# Altium PCB PCB3.PcbDoc
Units mil, origin at the board's own origin, x right, y up, seen from the top; angles counter-clockwise.
Board outline 6000 x 4000 mil, 2 copper layers (Top Layer, Bottom Layer); 34 components, 83 nets, 224 pads, 0 vias.
Unrouted connection lines stored in the file: 1.
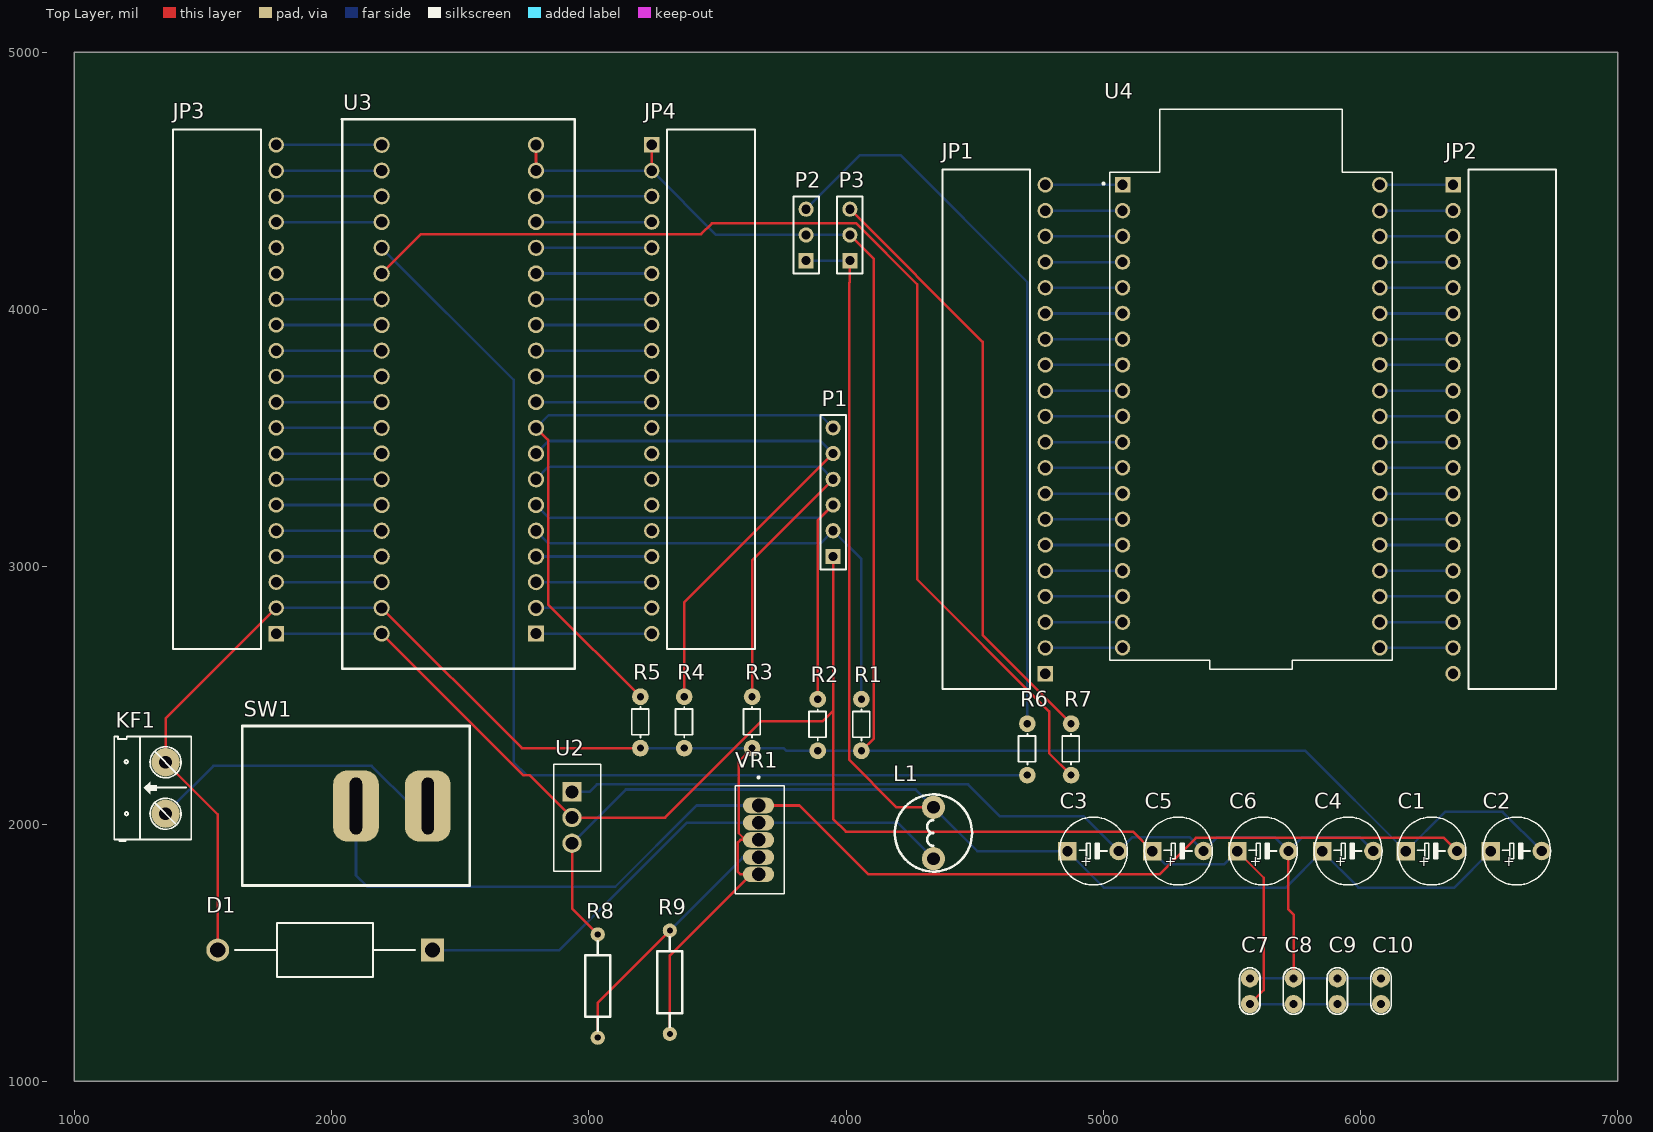
[diagram p0: Top Layer view]
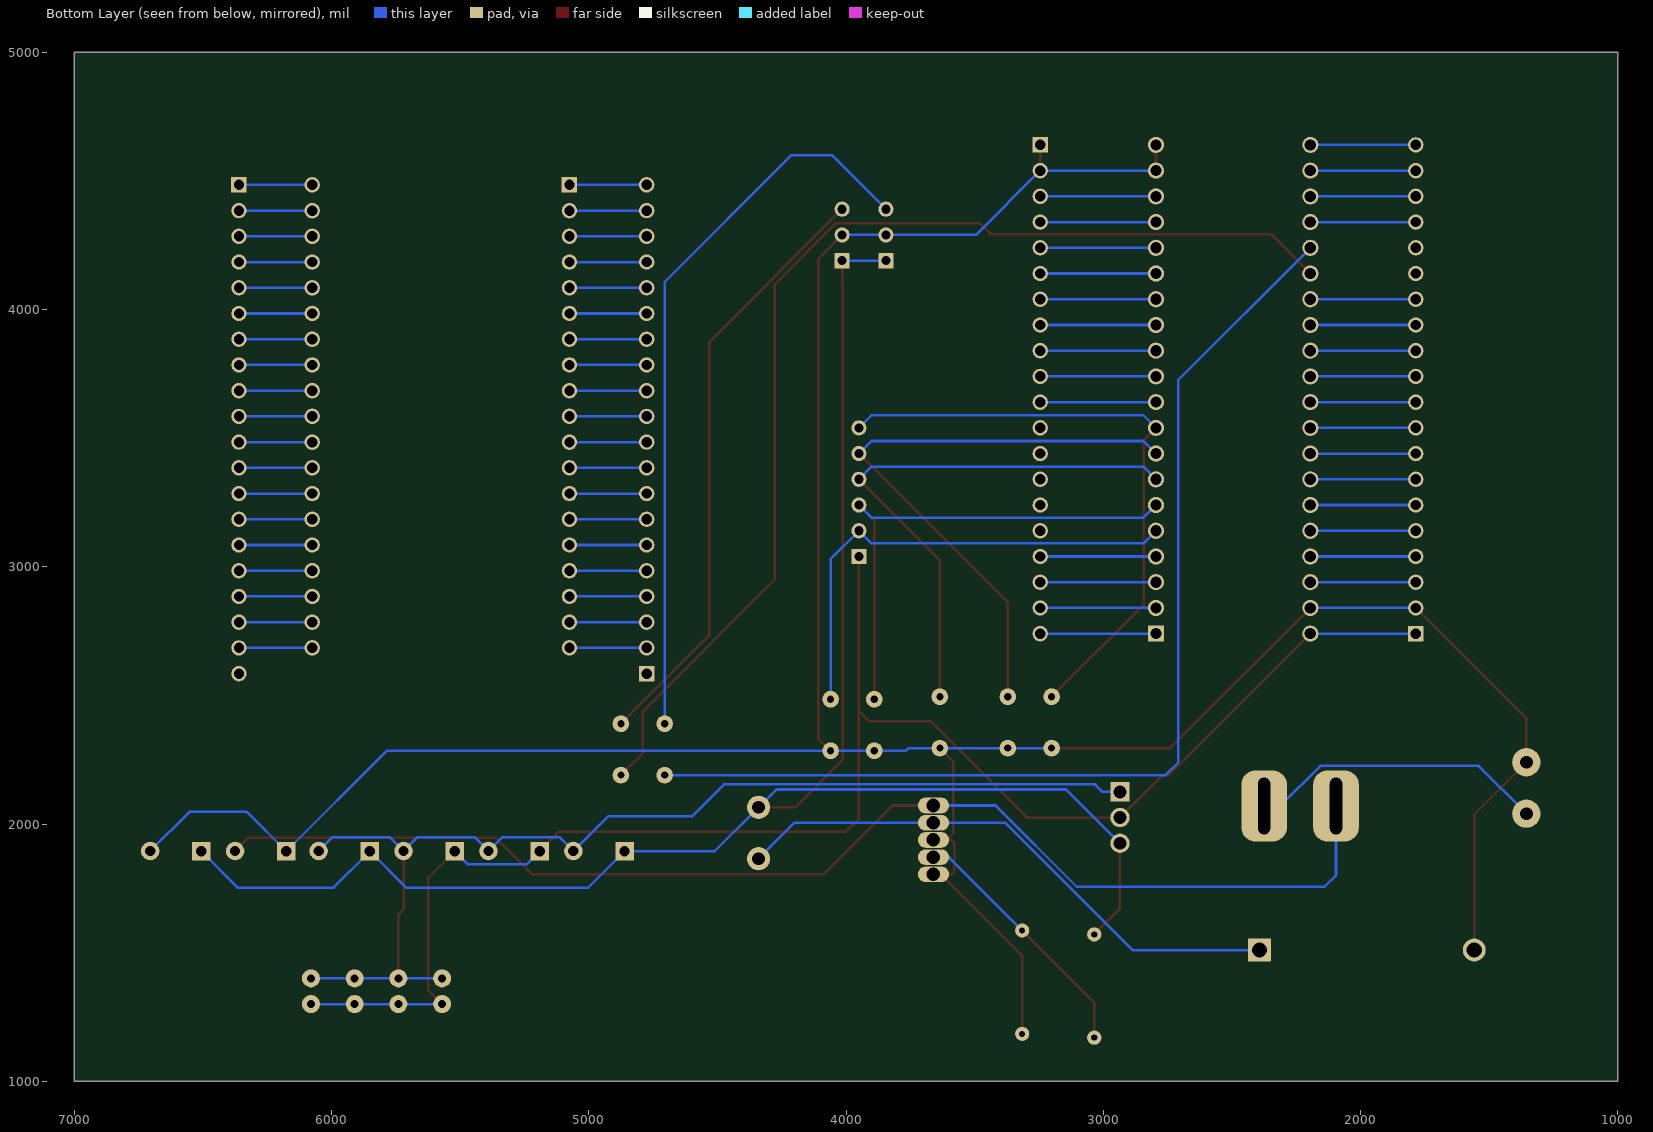
[diagram p1: Bottom Layer view, seen from below]
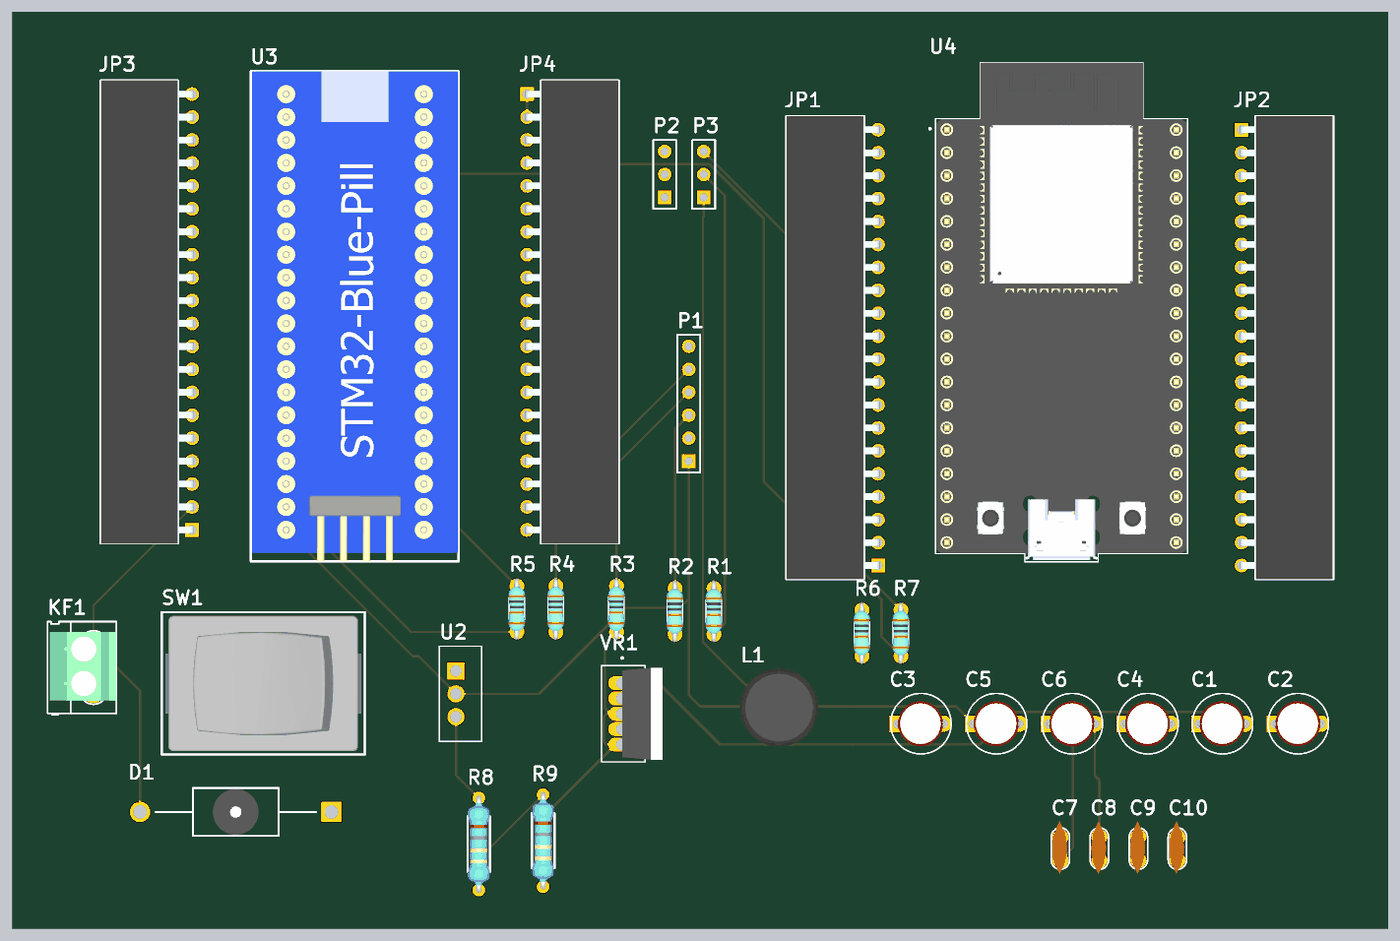
[diagram p2: 3D render of the assembled board from above, using the file's embedded part models]

## Layer stack, top to bottom
Top Solder: solder mask 0.4, Solder Resist, Dk 3.5
Top Layer: signal copper 1.4
Dielectric 1: dielectric 12.6, FR-4, Dk 4.8
Bottom Layer: signal copper 1.4
Bottom Solder: solder mask 0.4, Solder Resist, Dk 3.5

## Board outline
1000,1000 7000,1000 7000,5000 1000,5000

## Design rules (kind name [scope] priority, off if disabled: settings)
Clearance [All] p1: gap=10 ignorepadtopadclearanceinfootprint=FALSE except(0: Arc-Hole Track-Hole SMDPad-Hole THPad-Hole Via-Hole Fill-Hole Poly-Hole Region-Hole Text-Hole)
MinimumSolderMaskSliver [All] p1: minsoldermaskwidth=1
PolygonConnect [All] p1: connectstyle=Relief reliefconductorwidth=10 reliefentries=4 polygonreliefangle="90 Angle" airgapwidth=10
RoutingVias [All] p1: holewidth=28 width=50 viastyle="Through Hole" minholewidth=50 minwidth=50 maxholewidth=28 maxwidth=50
SolderMaskExpansion [All] p1: expansion=4 istentingtop=FALSE
Width [All] p1: maxlimit=10 minlimit=10 preferedwidth=10
29 further rules are at their usual default settings.

## Components (designator, comment, footprint, x,y, rotation, side; value= is the part's Value field where it differs from the comment)
C1 "100uF" CA-ALU-5R 6275,1895 r0 top
C2 "300uF" CA-ALU-5R 6605,1895 r0 top
C3 "22uF" CA-ALU-5R 4960,1895 r0 top
C4 "100uF" CA-ALU-5R 5950,1895 r0 top
C5 "100uF" CA-ALU-5R 5290,1895 r0 top
C6 "22uF" CA-ALU-5R 5620,1895 r0 top
C7 "104" CN1 5570,1300 r90 top
C8 "104" CN1 5740,1300 r90 top
C9 "104" CN1 5910,1300 r90 top
C10 "104" CN1 6080,1300 r90 top
D1 "1N5822" DIOAD2120W130L950D530P 1975,1510 r180 top
JP1 "JP 1x20 2.54" "JP 1x20 CC" 4775,3534.61 r90 top
JP2 "JP 1x20 2.54" "JP 1x20 CC" 6360,3534.61 r270 top
JP3 "JP 1x20 2.54" "JP 1x20 CC" 1784.93,3690 r90 top
JP4 "JP 1x20 2.54" "JP 1x20 CC" 3245,3690 r270 top
KF1 "CON 2 KF301" "Con 2 KF301 5.08" 1355,2040 r90 top
L1 "68uH 3A" "CUON CAM 100uH3A" 4340,1965 r90 top
P1 "Quang_tro" HDR1X6 3950,3040 r90 top
P2 "Servo_H" HDR1X3 3845,4190 r90 top
P3 "Servo_V" HDR1X3 4015,4190 r90 top
R1 "10k" R1/8W 4060,2385 r90 top value="R1/4W - 1K"
R2 "10k" R1/8W 3890,2385 r90 top value="R1/4W - 1K"
R3 "10k" R1/8W 3635,2395 r90 top value="R1/4W - 1K"
R4 "10k" R1/8W 3370.86,2395 r90 top value="R1/4W - 1K"
R5 "10k" R1/8W 3200.86,2395 r90 top value="R1/4W - 1K"
R6 "10k" R1/8W 4705,2290 r90 top value="R1/4W - 1K"
R7 "10k" R1/8W 4875,2290 r90 top value="R1/4W - 1K"
R8 "12k" "tro vach 1/4w" 3035,1370 r90 top
R9 "2.2k" "tro vach 1/4w" 3315,1385 r90 top
SW1 "SWITCH 10A-2PIN" SW_2ARS_TH 2372.53,2071 r270 top
U2 "LM1117T-ADJ" TO254P470X1016X2222-3P 2975,1925 r270 top
U3 "Bluepill" "Blue Pill" 2195,2740 r0 top
U4 "ESP32-DEVKITC" MODULE_ESP32-DEVKITC 5575,3585 r0 top
VR1 "LM2576T-ADJ" TO170P1067X483X1651-5 3660,1938.07 r270 top

## Footprints (in the part's own frame and the unit in brackets; to place one, negate y for a bottom-side part, rotate by r counter-clockwise, add the part's x,y. Pads: shape width x height; smd on the part's side, far side on the other; paste and mask are expansions set on the pad)
"Blue Pill" [mm]
  round 1.6 hole 1.1: 1(0,48.26) 2(0,45.72) 3(0,43.18) 4(0,40.64) 5(0,38.1) 6(0,35.56) 7(0,33.02) 8(0,30.48) 9(0,27.94) 10(0,25.4) 11(0,22.86) 12(0,20.32) 13(0,17.78) 14(0,15.24) 15(0,12.7) 16(0,10.16) 17(0,7.62) 18(0,5.08) 19(0,2.54) 20(0,0) 22(15.24,2.54) 23(15.24,5.08) 24(15.24,7.62) 25(15.24,10.16) 26(15.24,12.7) 27(15.24,15.24) 28(15.24,17.78) 29(15.24,20.32) 30(15.24,22.86) 31(15.24,25.4) 32(15.24,27.94) 33(15.24,30.48) 34(15.24,33.02) 35(15.24,35.56) 36(15.24,38.1) 37(15.24,40.64) 38(15.24,43.18) 39(15.24,45.72) 40(15.24,48.26)
  rect 1.6x1.6 hole 1.1: 21(15.24,0)
  silkscreen extent -3.94,-3.48 19.08,50.8, body extent -3.81,-3.48 19.05,50.8, height 3.56
CA-ALU-5R [mil]
  rect 72x72 hole 40: 1(-99,-1)
  round 72 hole 40: 2(100,0)
  silkscreen extent -130,-132 134,132, body extent -108,-98 108,98, height 551
CN1 [mil]
  round 70 hole 31: 1(0,0) 2(100,0)
  silkscreen extent -40,-40 141,40, body extent -60,-30 170,37, height 265
"Con 2 KF301 5.08" [mil]
  round 110 hole 50: 1(0,0) 2(200,0)
  silkscreen extent -106,-100 300,200, body extent -45,-97 255,190, height 335
"CUON CAM 100uH3A" [mil] "100uH3A"
  round 90 hole 50: 1(-100,0) 2(100,0)
  silkscreen extent -150,-150 150,150, body extent -171,-175 171,167, height 394
DIOAD2120W130L950D530P [mm]
  round 2.25 hole 1.5: A(10.6,0)
  rect 2.25x2.25 / inner round 2.25 / far side rect 2.25x2.25 hole 1.5: C(-10.6,0)
  silkscreen extent -8.89,-2.65 8.89,2.65, body extent -2.54,-2.54 2.54,2.54, height 30.16
HDR1X3 [mm] "Connector; Header; 3 Position"
  rect 1.5x1.5 hole 0.9: 1(0,0)
  round 1.5 hole 0.9: 2(2.54,0) 3(5.08,0)
  silkscreen extent -1.27,-1.27 6.35,1.27, body extent -1.27,-1.27 6.35,1.27, height 7
HDR1X6 [mm] "Connector; Header; 6 Position"
  rect 1.5x1.5 hole 0.9: 1(0,0)
  round 1.5 hole 0.9: 2(2.54,0) 3(5.08,0) 4(7.62,0) 5(10.16,0) 6(12.7,0)
  silkscreen extent -1.27,-1.27 13.97,1.27, body extent -1.27,-1.27 13.97,1.27, height 7
"JP 1x20 CC" [mm] "20p 1 row Right angle"
  rect 1.52x1.52 hole 1.02: 1(-24.13,0)
  round 1.52 hole 1.02: 2(-21.59,0) 3(-19.05,0) 4(-16.51,0) 5(-13.97,0) 6(-11.43,0) 7(-8.89,0) 8(-6.35,0) 9(-3.81,0) 10(-1.27,0) 11(1.27,0) 12(3.81,0) 13(6.35,0) 14(8.89,0) 15(11.43,0) 16(13.97,0) 17(16.51,0) 18(19.05,0) 19(21.59,0) 20(24.13,0)
  silkscreen extent -25.65,1.52 25.65,10.17, body extent -25.65,-0.21 25.65,10.09, height 2.51
MODULE_ESP32-DEVKITC [mm]
  rect 1.53x1.53 / inner round 1.53 / far side rect 1.53x1.53 hole 1.02: 1(-12.7,22.85)
  round 1.53 hole 1.02: 2(-12.7,20.31) 3(-12.7,17.77) 4(-12.7,15.23) 5(-12.7,12.69) 6(-12.7,10.15) 7(-12.7,7.61) 8(-12.7,5.07) 9(-12.7,2.53) 10(-12.7,-0.01) 11(-12.7,-2.55) 12(-12.7,-5.09) 13(-12.7,-7.63) 14(-12.7,-10.17) 15(-12.7,-12.71) 16(-12.7,-15.25) 17(-12.7,-17.79) 18(-12.7,-20.33) 19(-12.7,-22.87) 20(12.7,-22.87) 21(12.7,-20.33) 22(12.7,-17.79) 23(12.7,-15.25) 24(12.7,-12.71) 25(12.7,-10.17) 26(12.7,-7.63) 27(12.7,-5.09) 28(12.7,-2.55) 29(12.7,-0.01) 30(12.7,2.53) 31(12.7,5.07) 32(12.7,7.61) 33(12.7,10.15) 34(12.7,12.69) 35(12.7,15.23) 36(12.7,17.77) 37(12.7,20.31) 38(12.7,22.85)
  silkscreen extent -14.67,-25 13.95,30.3, body extent -13.97,-24.8 13.97,30.3, height 3.25
R1/8W [mil] "R 1/8W, 2 pin, 300mil"
  round 65 hole 28: 1(-100,0) 2(100,0)
  silkscreen extent -60,-32 61,34, body extent -135,-35 135,37, height 86
SW_2ARS_TH [mm] "CASE: TH"
  rrect60% 7x4.5 hole 1.2 slot 5.6 at 0 deg mask+0.076: 1(0.025,0.051) 2(0.025,-7.049)
  silkscreen extent -7.87,-18.29 7.87,4.19, body extent -7.47,-17.9 7.53,3.8, height 17.81
TO170P1067X483X1651-5 [mm]
  oval 1.55x3.1 hole 1.34: 1(-3.4,0) 2(-1.7,0) 3(0,0) 4(1.7,0) 5(3.4,0)
  silkscreen extent -6.27,-2.29 5.33,2.54, body extent -5.08,0 5.08,4.45, height 16.84
TO254P470X1016X2222-3P [mil]
  rect 75x75 hole 50: 1(-200,-40)
  round 75 hole 50: 2(-100,-40) 3(0,-40)
  silkscreen extent -308,-112 108,72
"tro vach 1/4w" [mm]
  round 1.4 hole 0.6: 1(-5.1,0) 2(5.1,0)
  silkscreen extent -4.39,-1.25 4.42,1.25, body extent -5.38,-1.2 5.38,1.2, height 2.41

## Part data
C1 C2: library part "Tu Nhom 100uF 16V", "Dán", Chung_Loai=Dán, Don_Vi=Con, Ma_Hang=MH002219, So_Chan=2, Ten_Linh_Kien="Tụ Nhôm 100uF 16V 6.3x5.4MM"
C3 C6: library part "Tu tantalum 22uF 25V SMD6032", "Dán", Chung_Loai=Dán, Don_Vi=Con, Ma_Hang=MH002651, So_Chan=2, Ten_Linh_Kien="Tụ tantalum 226E-22uF 25V SMD6032"
C4 C5: library part "Tu tantalum 100uF 10V SMD6032", "Dán", Chung_Loai=Dán, Don_Vi=Con, Ma_Hang=MH007594, So_Chan=2, Ten_Linh_Kien="Tụ tantalum 107A-100uF 10V SMD6032"
C7 C8 C9 C10: library part "Tu 0603 104 50V 10%", "Dán", Chung_Loai=Dán, Don_Vi=Con, Ma_Hang=MH004568, So_Chan=2, Ten_Linh_Kien="Tụ 0603 104-100nF 10% 50V"
D1: "Diode Schottky 40 V 3A Through Hole DO-201AD", Package="DO-201 STMicroelectronics", Availability="In Stock", Check_prices=https://www.snapeda.com/parts/1N5822/STMicroelectronics/view-part/?ref=eda, MF=STMicroelectronics, MP=1N5822, Price=None, Purchase-URL=https://pricing.snapeda.com/search/part/1N5822/?ref=eda, SnapEDA_Link=https://www.snapeda.com/parts/1N5822/STMicroelectronics/view-part/?ref=snap
JP1 JP2 JP3 JP4: library part "JP 1x20 2.54 Cai Cong", "Cắm", Chung_Loai=Cắm, Don_Vi=Con, Ma_Hang=MH001265, Ten_Linh_Kien="Jump Đơn Cái 2.54MM 1x40P Cong"
KF1: "Cắm", Chung_Loai=Cắm, Don_Vi=Con, Ma_Hang=MH000987, Ten_Linh_Kien="CON 2 KF301-2P 5.08MM Xanh Dương"
L1: library part "CUON CAM 100uH DIP", "Dán", Chung_Loai=Dán, Don_Vi=Con, Ma_Hang=MH002209, Ten_Linh_Kien="Cuộn Cảm 100uH 3A 8x10MM"
P1: library part "Header 6", "Header, 6-Pin", LatestRevisionDate=17-Jul-2002, LatestRevisionNote="Re-released for DXP Platform.", Publisher="Altium Limited"
P2 P3: library part "Header 3", "Header, 3-Pin", LatestRevisionDate=17-Jul-2002, LatestRevisionNote="Re-released for DXP Platform.", Publisher="Altium Limited"
R1 R2 R3 R4 R5 R6 R7: library part R, "Resistor 1/4W"
R8: library part "Tro Vach 1/4W 5% 12k", "Cắm", Chung_Loai=Cắm, Don_Vi=Con, Ma_Hang=MH007389, So_Chan=2, Ten_Linh_Kien="Trở Vạch 1/4w 5% 12k"
R9: library part "Tro Vach 1/4W 5% 2.2k", "Cắm", Chung_Loai=Cắm, Don_Vi=Con, Ma_Hang=MH007293, So_Chan=2, Ten_Linh_Kien="Trở Vạch 1/4w 5% 2.2k"
SW1: library part SW1_RS-471005264153-TH, "Rocker Switch SPST 16A (AC), 10A (DC) 250V Panel Mount, Snap-In", Alternate Part Number-1=NA, Case/Package=TH, Manufacturer="Würth Elektronik", Manufacturer Part Number=471005264153, Supplier Part Number-1=471005264153, Supplier-1="Würth Elektronik"
U2: "Linear Voltage Regulator IC 1 Output 800mA TO-220-3", Package="TO-220 National Semiconductor", Availability=Unavailable, MF="Texas Instruments", MP=LM1117TADJ, Price=None, SnapEDA_Link=https://www.snapeda.com/parts/LM1117TADJ/Texas%20Instruments/view-part/20524/?ref=snap
U3: library part STM32F103C8T6, "STM32F103C8T6"
U4: "ESP32-WROOM-32UE series Transceiver; 802.11 b/g/n (Wi-Fi, WiFi, WLAN), Bluetooth Â® Smart Ready 4.x Dual Mode Evaluation Board", Package=None, Availability="In Stock", Check_prices=https://www.snapeda.com/parts/ESP32-DEVKITC/Espressif+Systems/view-part/?ref=eda, MF="Espressif Systems", MP=ESP32-DEVKITC, Price=None, Purchase-URL=https://pricing.snapeda.com/search/part/ESP32-DEVKITC/?ref=eda, SnapEDA_Link=https://www.snapeda.com/parts/ESP32-DEVKITC/Espressif+Systems/view-part/?ref=snap
VR1: "SIMPLE SWITCHER&reg; 40V, 3A Low Component Count Step-Down Regulator 5-TO-220 -40 to 125", Package="TO-220-5 Texas Instruments", Availability="In Stock", Check_prices=https://www.snapeda.com/parts/LM2576T-ADJ/Texas+Instruments/view-part/?ref=eda, MF="Texas Instruments", MP=LM2576T-ADJ, Price=None, Purchase-URL=https://pricing.snapeda.com/search/part/LM2576T-ADJ/?ref=eda, SnapEDA_Link=https://www.snapeda.com/parts/LM2576T-ADJ/Texas+Instruments/view-part/?ref=snap

## Nets (pads, with @x,y where several pads share a name; then routed paths per layer and width w, separated by ;. In a path a pad name is that pad's centre, name@x,y a point inside that pad or via, vN(x,y) a via of type N, cw(c..) or ccw(c..) an arc to the next point about the centre after c; other vN are vias at no path point)
GND: C1.1 C2.2 C3.2 C4.2 C5.2 C6.2 C7.2 C8.2 C9.2 C10.2 D1.A JP3.2 JP4.1 JP4.2 KF1.2 P2.2 P3.2 R1.1 R2.1 R3.1 R4.1 R5.1 R9.1 U2.1 U3.19 U3.39 U3.40 VR1.3 VR1.5 | length 16420.9
  Top Layer w10: D1.A 1557.68,2037.32 KF1.2 1355,2410.07 JP3.2 ; U3.19 2740,2295 R5.1 ; U3.39 U3.40 ; JP4.2 JP4.1 ; R9.1 3315,1489.21 VR1.5@3630,1804.21 ; R3.1 3583,2243 3583,1964 VR1.3@3608.93,1938.07 ; VR1.5 VR1.5@3630,1804.21 ; VR1.3 VR1.3@3608.93,1938.07 ; P3.2 4108,4197 4108,2333 R1.1 ; C6.2 5720,1668 5740,1648 C8.2 ; VR1.3@3608.93,1938.07 3590,1938.07 3580,1928.07 3580,1814.21 3590,1804.21 VR1.5@3630,1804.21
  Bottom Layer w10: JP3.2 U3.19 ; U3.39 JP4.2 3495,4290 P2.2 P3.2 ; U2.1 3003,2125 3032,2154 4475,2154 4599,2030 4925,2030 C3.2 5114,1949 5336,1949 C5.2 5444,1949 5666,1949 C6.2 5774,1949 5996,1949 C4.2 ; R5.1 R4.1 R3.1 3757,2295 3767,2285 R2.1 R1.1 5785,2285 C1.1 6329,2047 6553,2047 C2.2 ; C7.2 C8.2 C9.2 C10.2
IN0: P1.2 R1.2 U3.25 | length 1896.2
  Bottom Layer w10: U3.25 2844,3091 3901,3091 P1.2 4060,3030 R1.2
IN1: P1.3 R2.2 U3.26 | length 1975.4
  Top Layer w10: R2.2 3890,3180 P1.3
  Bottom Layer w10: U3.26 2844,3191 3901,3191 P1.3
IN2: P1.4 R3.2 U3.27 | length 2171.1
  Top Layer w10: R3.2 3635,3025 P1.4
  Bottom Layer w10: U3.27 2844,3389 3901,3389 P1.4
IN3: P1.5 R4.2 U3.28 | length 2380.5
  Top Layer w10: R4.2 3370.86,2860.86 P1.5
  Bottom Layer w10: U3.28 2844,3489 3901,3489 P1.5
IN4: P1.6 R5.2 U3.29 | length 2408.7
  Top Layer w10: U3.29 2842,3493 2842,2853.86 R5.2
  Bottom Layer w10: U3.29 2844,3589 3901,3589 P1.6
NetC1_2: C1.2 SW1.2 VR1.1 | length 4890
  Top Layer w10: VR1.1 3819,2071.93 4086.93,1804 5218,1804 5360,1946 6324,1946 C1.2
  Bottom Layer w10: SW1.2 2095,1800 2139,1756 3103,1756 3418.93,2071.93 VR1.1
NetD1_C: D1.C L1.1 VR1.2 | length 2210.7
  Bottom Layer w10: D1.C 2886,1510 3381,2005 VR1.2 4200,2005 L1.1
NetJP1_2: JP1.2 U4.19 | length 300
  Bottom Layer w10: JP1.2 U4.19
NetJP1_3: JP1.3 U4.18 | length 300
  Bottom Layer w10: JP1.3 U4.18
NetJP1_4: JP1.4 U4.17 | length 300
  Bottom Layer w10: JP1.4 U4.17
NetJP1_5: JP1.5 U4.16 | length 300
  Bottom Layer w10: JP1.5 U4.16
NetJP1_6: JP1.6 U4.15 | length 300
  Bottom Layer w10: JP1.6 U4.15
NetJP1_7: JP1.7 U4.14 | length 300
  Bottom Layer w10: JP1.7 U4.14
NetJP1_8: JP1.8 U4.13 | length 300
  Bottom Layer w10: JP1.8 U4.13
NetJP1_9: JP1.9 U4.12 | length 300
  Bottom Layer w10: JP1.9 U4.12
NetJP1_10: JP1.10 U4.11 | length 300
  Bottom Layer w10: JP1.10 U4.11
NetJP1_11: JP1.11 U4.10 | length 300
  Bottom Layer w10: JP1.11 U4.10
NetJP1_12: JP1.12 U4.9 | length 300
  Bottom Layer w10: JP1.12 U4.9
NetJP1_13: JP1.13 U4.8 | length 300
  Bottom Layer w10: JP1.13 U4.8
NetJP1_14: JP1.14 U4.7 | length 300
  Bottom Layer w10: JP1.14 U4.7
NetJP1_15: JP1.15 U4.6 | length 300
  Bottom Layer w10: JP1.15 U4.6
NetJP1_16: JP1.16 U4.5 | length 300
  Bottom Layer w10: JP1.16 U4.5
NetJP1_17: JP1.17 U4.4 | length 300
  Bottom Layer w10: JP1.17 U4.4
NetJP1_18: JP1.18 U4.3 | length 300
  Bottom Layer w10: JP1.18 U4.3
NetJP1_19: JP1.19 U4.2 | length 300
  Bottom Layer w10: JP1.19 U4.2
NetJP1_20: JP1.20 U4.1 | length 300
  Bottom Layer w10: JP1.20 U4.1
NetJP2_1: JP2.1 U4.38 | length 285
  Bottom Layer w10: U4.38 JP2.1
NetJP2_2: JP2.2 U4.37 | length 285
  Bottom Layer w10: U4.37 JP2.2
NetJP2_3: JP2.3 U4.36 | length 285
  Bottom Layer w10: U4.36 JP2.3
NetJP2_4: JP2.4 U4.35 | length 285
  Bottom Layer w10: U4.35 JP2.4
NetJP2_5: JP2.5 U4.34 | length 285
  Bottom Layer w10: U4.34 JP2.5
NetJP2_6: JP2.6 U4.33 | length 285
  Bottom Layer w10: U4.33 JP2.6
NetJP2_7: JP2.7 U4.32 | length 285
  Bottom Layer w10: U4.32 JP2.7
NetJP2_8: JP2.8 U4.31 | length 285
  Bottom Layer w10: U4.31 JP2.8
NetJP2_9: JP2.9 U4.30 | length 285
  Bottom Layer w10: U4.30 JP2.9
NetJP2_10: JP2.10 U4.29 | length 285
  Bottom Layer w10: U4.29 JP2.10
NetJP2_11: JP2.11 U4.28 | length 285
  Bottom Layer w10: U4.28 JP2.11
NetJP2_12: JP2.12 U4.27 | length 285
  Bottom Layer w10: U4.27 JP2.12
NetJP2_13: JP2.13 U4.26 | length 285
  Bottom Layer w10: U4.26 JP2.13
NetJP2_14: JP2.14 U4.25 | length 285
  Bottom Layer w10: U4.25 JP2.14
NetJP2_15: JP2.15 U4.24 | length 285
  Bottom Layer w10: U4.24 JP2.15
NetJP2_16: JP2.16 U4.23 | length 285
  Bottom Layer w10: U4.23 JP2.16
NetJP2_17: JP2.17 U4.22 | length 285
  Bottom Layer w10: U4.22 JP2.17
NetJP2_18: JP2.18 U4.21 | length 285
  Bottom Layer w10: U4.21 JP2.18
NetJP2_19: JP2.19 U4.20 | length 285
  Bottom Layer w10: U4.20 JP2.19
NetJP3_3: JP3.3 U3.18 | length 410.1
  Bottom Layer w10: JP3.3 U3.18
NetJP3_4: JP3.4 U3.17 | length 410.1
  Bottom Layer w10: JP3.4 U3.17
NetJP3_5: JP3.5 U3.16 | length 410.1
  Bottom Layer w10: JP3.5 U3.16
NetJP3_6: JP3.6 U3.15 | length 410.1
  Bottom Layer w10: JP3.6 U3.15
NetJP3_7: JP3.7 U3.14 | length 410.1
  Bottom Layer w10: JP3.7 U3.14
NetJP3_8: JP3.8 U3.13 | length 410.1
  Bottom Layer w10: JP3.8 U3.13
NetJP3_9: JP3.9 U3.12 | length 410.1
  Bottom Layer w10: JP3.9 U3.12
NetJP3_10: JP3.10 U3.11 | length 410.1
  Bottom Layer w10: JP3.10 U3.11
NetJP3_11: JP3.11 U3.10 | length 410.1
  Bottom Layer w10: JP3.11 U3.10
NetJP3_12: JP3.12 U3.9 | length 410.1
  Bottom Layer w10: JP3.12 U3.9
NetJP3_13: JP3.13 U3.8 | length 410.1
  Bottom Layer w10: JP3.13 U3.8
NetJP3_14: JP3.14 U3.7 | length 410.1
  Bottom Layer w10: JP3.14 U3.7
NetJP3_17: JP3.17 U3.4 | length 410.1
  Bottom Layer w10: JP3.17 U3.4
NetJP3_18: JP3.18 U3.3 | length 410.1
  Bottom Layer w10: JP3.18 U3.3
NetJP3_19: JP3.19 U3.2 | length 410.1
  Bottom Layer w10: JP3.19 U3.2
NetJP3_20: JP3.20 U3.1 | length 410.1
  Bottom Layer w10: JP3.20 U3.1
NetJP4_3: JP4.3 U3.38 | length 450
  Bottom Layer w10: U3.38 JP4.3
NetJP4_4: JP4.4 U3.37 | length 450
  Bottom Layer w10: U3.37 JP4.4
NetJP4_5: JP4.5 U3.36 | length 450
  Bottom Layer w10: U3.36 JP4.5
NetJP4_6: JP4.6 U3.35 | length 450
  Bottom Layer w10: U3.35 JP4.6
NetJP4_7: JP4.7 U3.34 | length 450
  Bottom Layer w10: U3.34 JP4.7
NetJP4_8: JP4.8 U3.33 | length 450
  Bottom Layer w10: U3.33 JP4.8
NetJP4_9: JP4.9 U3.32 | length 450
  Bottom Layer w10: U3.32 JP4.9
NetJP4_10: JP4.10 U3.31 | length 450
  Bottom Layer w10: U3.31 JP4.10
NetJP4_11: JP4.11 U3.30 | length 450
  Bottom Layer w10: U3.30 JP4.11
NetJP4_17: JP4.17 U3.24 | length 450
  Bottom Layer w10: U3.24 JP4.17
NetJP4_18: JP4.18 U3.23 | length 450
  Bottom Layer w10: U3.23 JP4.18
NetJP4_19: JP4.19 U3.22 | length 450
  Bottom Layer w10: U3.22 JP4.19
NetJP4_20: JP4.20 U3.21 | length 450
  Bottom Layer w10: U3.21 JP4.20
NetKF1_1: KF1.1 SW1.1 | length 1161.2
  Bottom Layer w10: KF1.1 1541,2226 2156,2226 2312,2070 SW1.1
NetP2_3: P2.3 R6.2 | length 2867.6
  Bottom Layer w10: P2.3 4055,4600 4211,4600 4705,4106 R6.2
NetP3_3: P3.3 R7.2 | length 2356.2
  Top Layer w10: P3.3 4531,3874 4531,2734 R7.2
NetR8_1: R8.1 R9.2 VR1.4 | length 997.6
  Top Layer w10: R8.1 3035,1305.79 R9.2
  Bottom Layer w10: R9.2 3597.21,1868 3597.21,1871.14 VR1.4
TIM_CH1: R6.1 U3.5 | length 4230.2
  Bottom Layer w10: U3.5 2708,3727 2708,2240 2758,2190 R6.1
TIM_CH2: R7.1 U3.6 | length 4416.6
  Top Layer w10: U3.6 2348,4293 3437,4293 3479,4335 4040,4335 4277,4098 4277,2951 4790,2438 4790,2275 R7.1
VCC3V3: C5.1 C6.1 C7.1 C8.1 C9.1 C10.1 JP3.1 P1.1 U2.2 U3.20 | length 6486.8
  Top Layer w10: U3.20 2746,2189 2771,2189 U2.2 3297,2025 3672,2400 3910,2400 3950,2440 ; P1.1 3950,2440 ; C5.1 5115,1970 4000,1970 3950,2020 3950,2440 ; C6.1 5624,1791 5624,1354 C7.1
  Bottom Layer w10: JP3.1 U3.20 ; C5.1 5241,1844 5471,1844 C6.1 ; C7.1 C8.1 C9.1 C10.1
VCC7V: C2.1 C3.1 C4.1 L1.2 P2.1 P3.1 R8.2 U2.3 | length 6902.1
  Top Layer w10: U2.3 2935,1670.79 R8.2 ; P3.1 4015,4106 4012,4103 4012,2250 4197,2065 L1.2
  Bottom Layer w10: U2.3 3144,2134 4271,2134 L1.2 4511,1894 C3.1 5002,1753 5710,1753 C4.1 5992,1753 6365,1753 C2.1 ; P2.1 P3.1
pads on no net: JP1.1 JP2.20 JP3.15 JP3.16 JP4.12 JP4.13 JP4.14 JP4.15 JP4.16

## Text inside footprints (layer, text, board x,y; h text height)
C1: Top Overlay "+" at 6225,1835 h40
C2: Top Overlay "+" at 6555,1835 h40
C3: Top Overlay "+" at 4910,1835 h40
C4: Top Overlay "+" at 5900,1835 h40
C5: Top Overlay "+" at 5240,1835 h40
C6: Top Overlay "+" at 5570,1835 h40